# EAGLE board Faulty TL072 detector (EAGLE 7.6.0)
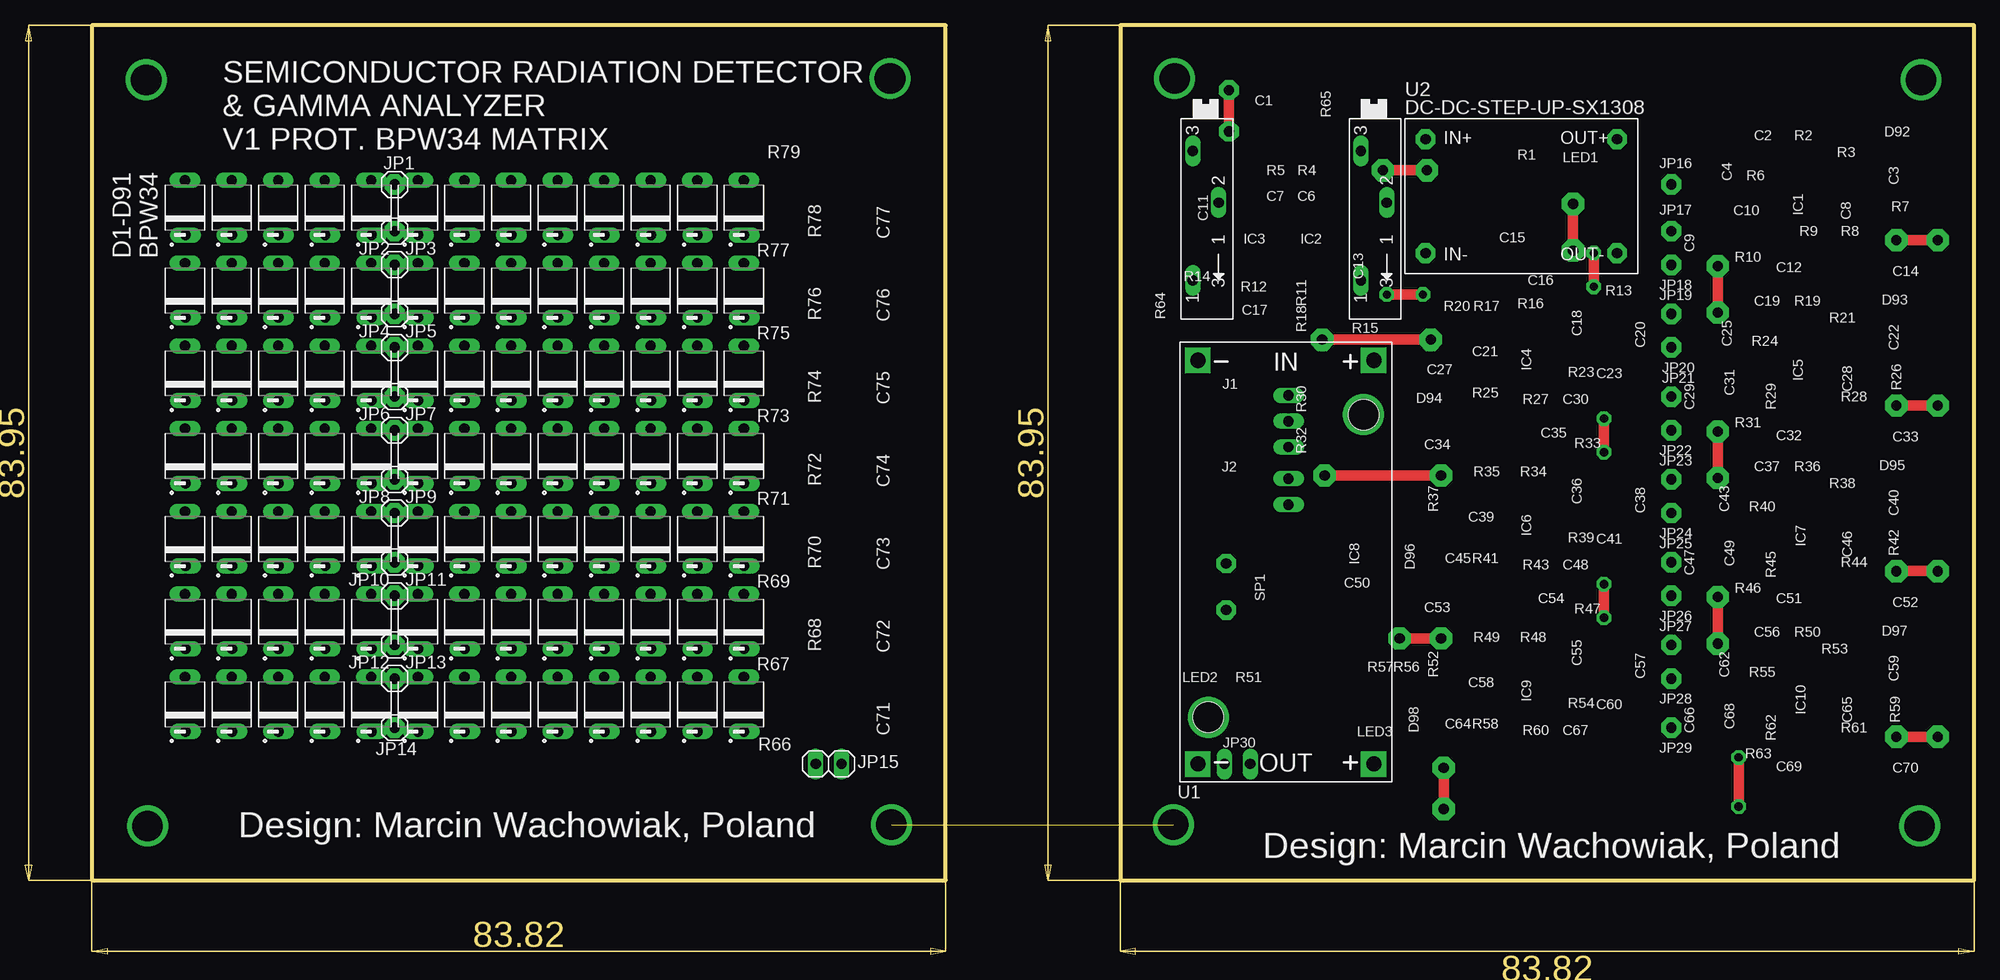
[diagram p0: board, top side]
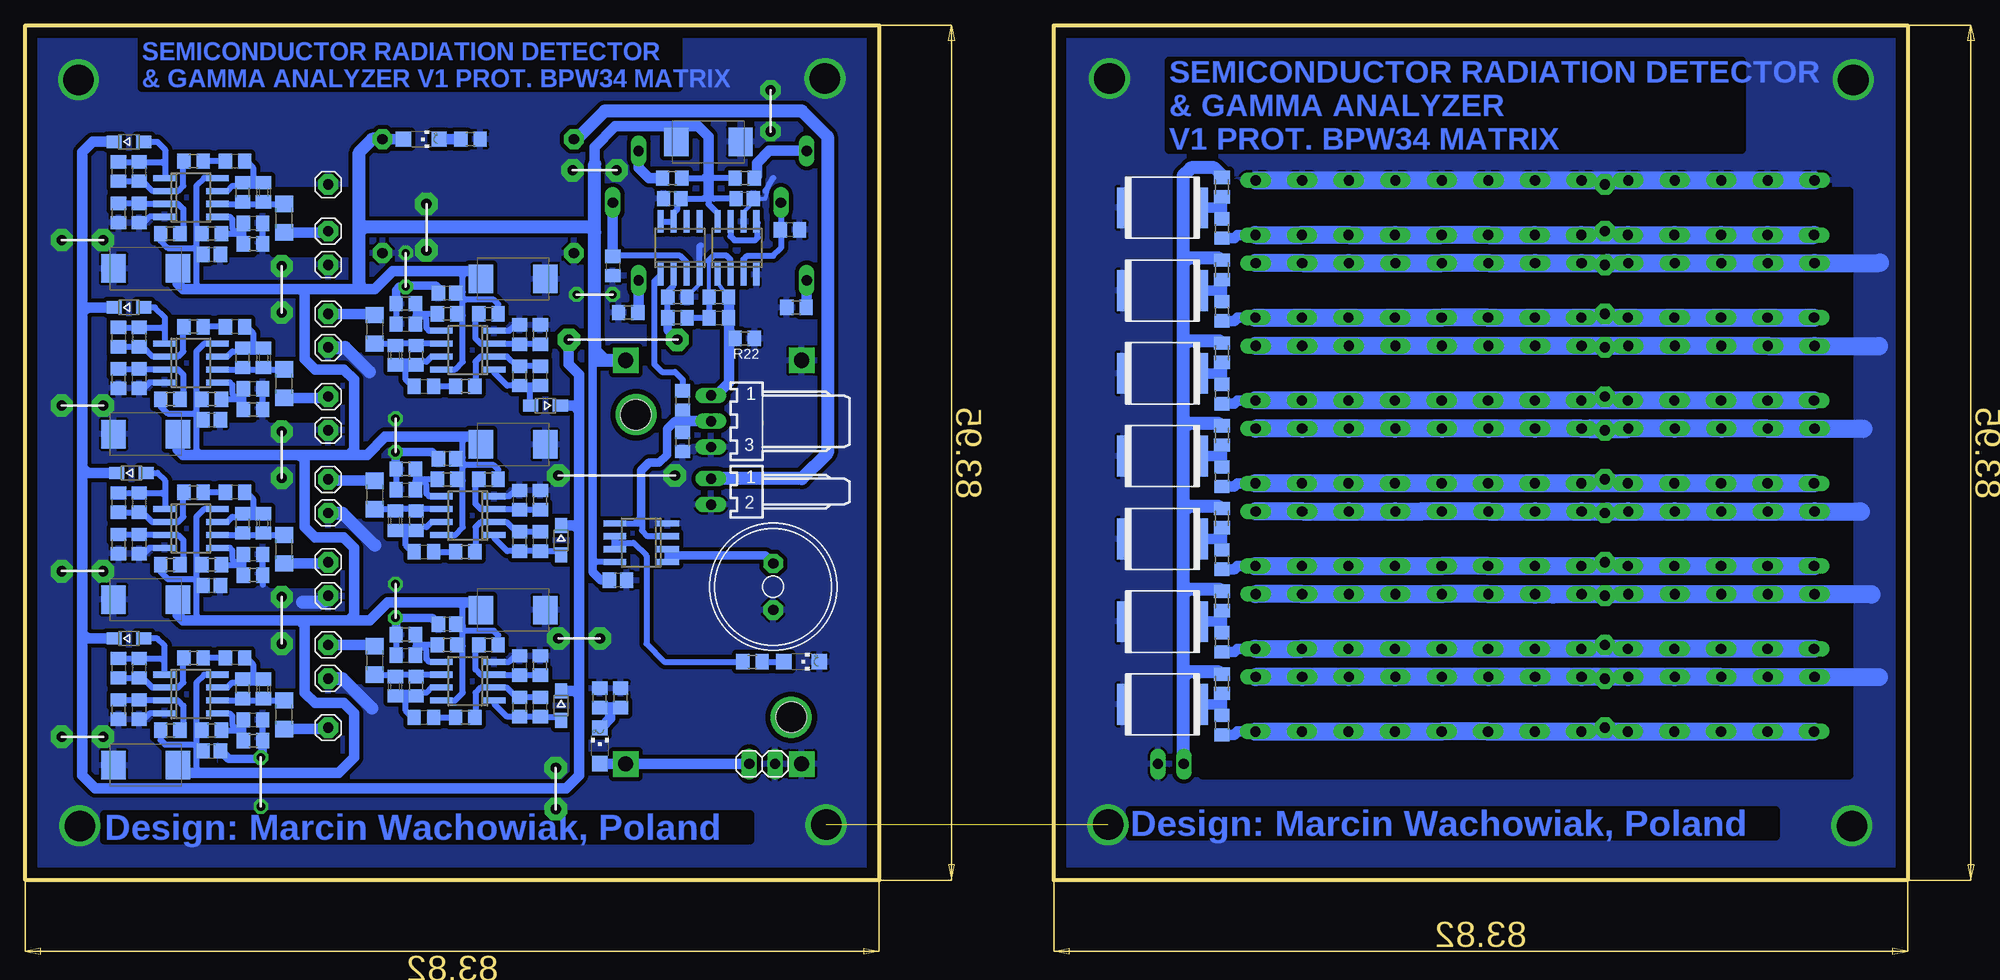
[diagram p1: board, bottom side, seen from below]

Size 184.78 x 83.95 mm. Coordinates in mm from the lower left corner, seen from the top.
Outline: 0,83.95 0,0 83.82,0 83.82,83.95 0,83.95
Outline: 184.78,83.95 100.97,83.95 100.97,0 184.78,0 184.78,83.95
Copper layers (1*16): Top 0.035mm / dielectric 1.5mm / Bottom 0.035mm
Design rules "default": minimum track width 10mil, minimum drill 24mil, track to track 8mil, track to pad 8mil, pad to pad 8mil, via to via 8mil, smd to smd 8mil, copper to edge 40mil, drill to drill 8mil, minimum pad ring 10mil, minimum via ring 8mil, stop-mask expansion 4mil, vias tented up to drill 0mil, thermal gap 10mil
bRestrict: area 153,61.6 to 160.4,67.7; area 154.3,29.1 to 160.7,32.9; area 154.3,13.3 to 160.7,17.1; area 154.3,12.1 to 160.7,13.3; area 154.3,45.3 to 160.7,49.4; area 148.5,52.2 to 156.3,57.3; area 148.5,35.9 to 156.3,41; area 148.5,19.7 to 156.3,24.8; area 5.7,10.3 to 65.9,67.7; area 65.9,15.4 to 69.2,68.5; area 65.9,10.3 to 69.2,15.4; area 160.7,11.4 to 165.5,13.3; area 162.4,29.1 to 165.7,29.6; area 162.4,45.3 to 165.7,45.8; area 162.4,61.6 to 165.7,62.1; area 143.9,57.3 to 148.5,58.5; area 143.9,41 to 148.5,42.3; area 143.9,24.8 to 148.5,26; area 148.5,24.8 to 149.6,26; area 119,59.3 to 119.1,59.7

## Footprints (pad centres in the part's own frame; a part is rotated, then mirrored left to right if it is on the bottom)
SMC_D = smd 2.4 x 2.8: + -3.15,0; - 3.15,0
C0805 = smd 1.3 x 1.5: 1 -0.95,0; 2 0.95,0
C0603 = smd 1.1 x 1: 1 -0.85,0; 2 0.85,0
C0805' = smd 1.3 x 1.5: 1 -0.85,0; 2 0.85,0
C1206 = smd 1.6 x 1.8: 1 -1.4,0; 2 1.4,0
2824 = smd 1.2 x 4: 1 -3.85,0; 2 3.85,0
PHODET_BPW34 = drill 1 long: A 2.699,0.001; C -2.667,-0.033
SOD323-W = smd 1.5 x 1.2: A 1.45,0; C -1.45,0
SO08 = smd 0.6 x 2.2: 1 -1.905,-2.6; 2 -0.635,-2.6; 3 0.635,-2.6; 4 1.905,-2.6; 5 1.905,2.6; 6 0.635,2.6; 7 -0.635,2.6; 8 -1.905,2.6
7395-03 = drill 1.016 long: 1 2.54,0; 2 0,0; 3 -2.54,0
7395-02 = drill 1.016 long: 1 1.27,0; 2 -1.27,0
1X01 = drill 1.016 pad 2 octagon: 1 0,0
1X02 = drill 1.016 long: 1 -1.27,0; 2 1.27,0
CHIPLED_1206 = smd 1.5 x 1.5: A 0,-1.75; C 0,1.75
R0805 = smd 1.3 x 1.5: 1 -0.95,0; 2 0.95,0
SP19L = drill 1.016 long: A 5.715,-1.27; E -6.985,-1.27; S -1.905,1.27
M0805 = smd 1.3 x 1.6: 1 -0.95,0; 2 0.95,0
AL11P = drill 1.016 pad 1.905 octagon: + 2.286,0; - -2.286,0
DC-DC-STEP-DOWN-LM2596 = drill 1.5 pad 2.5 square: IN+ -19.812,8.636; IN- -19.812,-8.636; OUT+ 19.812,8.636; OUT- 19.812,-8.636 | hole 3: -14.478,7.62; 15.24,-7.62
DC-DC-STEP-UP-SX1308 = drill 1 pad 1.93 octagon: IN+ -9.398,5.588; IN- -9.398,-5.588; OUT+ 9.398,5.588; OUT- 9.398,-5.588

## Placement (x,y rotation side)
C1  100u/25V  [SMC_D]  117.73,72.52 0 bottom
C2  22n  [C0805]  164.21,70.61 180 bottom
C3  10p  [C0805]  175.64,69.6 270 bottom
C4  0,5pF  [C0603]  161.42,67.56 270 bottom
C5  0,5/1p  [C0805]  161.42,67.56 270 bottom
C6  100n  [C0805']  121.28,66.93 180 bottom
C7  100n  [C0805']  114.17,66.93 0 bottom
C8  100n  [C0805]  173.61,65.53 90 bottom
C9  100n/100V  [C1206]  159.38,65.02 90 bottom
C10  100n  [C0805]  162.43,64.52 180 bottom
C11  100n  [C0805]  109.73,63.88 180 bottom
C12  100n  [C0805']  166.5,61.47 0 bottom
C13  100n  [C0805]  127.13,60.33 270 bottom
C14  100u/25V  [SMC_D]  172.97,60.07 180 bottom
C15  100u/25V  [SMC_D]  136.91,59.06 0 bottom
C16  100n  [C0805']  143.38,57.66 180 bottom
C17  10p  [C0805]  116.71,55.25 0 bottom
C18  100n  [C0805]  147.45,54.61 0 bottom
C19  22n  [C0805]  164.21,54.36 180 bottom
C20  100n/100V  [C1206]  150.5,54.1 270 bottom
C21  100n  [C0805]  136.27,53.59 270 bottom
C22  10p  [C0805]  175.64,53.34 270 bottom
C23  0,5pF  [C0603]  148.46,51.56 90 bottom
C24  0,5/1p  [C0805]  148.46,51.56 90 bottom
C25  0,5/1p  [C0603]  161.42,51.31 270 bottom
C26  0,5/1p  [C0805]  161.42,51.31 270 bottom
C27  10p  [C0805]  134.24,49.53 90 bottom
C28  100n  [C0805]  173.61,49.28 90 bottom
C29  100n/100V  [C1206]  159.38,48.77 90 bottom
C30  22n  [C0805]  145.67,48.51 0 bottom
C31  100n  [C0805]  162.43,48.26 180 bottom
C32  100n  [C0805']  166.5,45.21 0 bottom
C33  100u/25V  [SMC_D]  172.97,43.82 180 bottom
C34  100u/25V  [SMC_D]  136.91,42.8 0 bottom
C35  100n  [C0805']  143.38,41.4 180 bottom
C36  100n  [C0805]  147.45,38.35 0 bottom
C37  22n  [C0805]  164.21,38.1 180 bottom
C38  100n/100V  [C1206]  150.5,37.85 270 bottom
C39  100n  [C0805]  136.27,37.34 270 bottom
C40  10p  [C0805]  175.64,37.08 270 bottom
C41  0,5pF  [C0603]  148.46,35.31 90 bottom
C42  0,5/1p  [C0805]  148.46,35.31 90 bottom
C43  0,5pF  [C0603]  161.42,35.05 270 bottom
C44  0,5/1p  [C0805]  161.42,35.05 270 bottom
C45  10p  [C0805]  134.24,33.27 90 bottom
C46  100n  [C0805]  173.61,33.02 90 bottom
C47  100n/100V  [C1206]  159.38,32.51 90 bottom
C48  22n  [C0805]  145.67,32.26 0 bottom
C49  100n  [C0805]  162.43,32 180 bottom
C50  100n  [C0805']  126.62,29.46 180 bottom
C51  100n  [C0805']  166.5,28.96 0 bottom
C52  100u/25V  [SMC_D]  172.97,27.56 180 bottom
C53  100u/25V  [SMC_D]  136.91,26.54 0 bottom
C54  100n  [C0805']  143.38,25.15 180 bottom
C55  100n  [C0805]  147.45,22.1 0 bottom
C56  22n  [C0805]  164.21,21.84 180 bottom
C57  100n/100V  [C1206]  150.5,21.59 270 bottom
C58  100n  [C0805]  136.27,21.08 270 bottom
C59  10p  [C0805]  175.64,20.83 270 bottom
C60  0,5pF  [C0603]  148.46,19.05 90 bottom
C61  0,5/1p  [C0805]  148.46,19.05 90 bottom
C62  0,5pF  [C0603]  161.42,18.8 270 bottom
C63  0,5/1p  [C0805]  161.42,18.8 270 bottom
C64  10p  [C0805]  134.24,17.02 90 bottom
C65  100n  [C0805]  173.61,16.76 90 bottom
C66  100n/100V  [C1206]  159.38,16.26 90 bottom
C67  22n  [C0805]  145.67,16 0 bottom
C68  100n  [C0805]  162.43,15.75 180 bottom
C69  100n  [C0805']  166.5,12.7 0 bottom
C70  100u/25V  [SMC_D]  172.97,11.3 180 bottom
C71  2,2uF/100V  [2824]  73.15,17.27 180 bottom
C72  2,2uF/100V  [2824]  73.15,25.4 180 bottom
C73  2,2uF/100V  [2824]  73.15,33.53 180 bottom
C74  2,2uF/100V  [2824]  73.15,41.66 180 bottom
C75  2,2uF/100V  [2824]  73.15,49.78 180 bottom
C76  2,2uF/100V  [2824]  73.15,57.91 180 bottom
C77  2,2uF/100V  [2824]  73.15,66.04 180 bottom
D1  BPW34  [PHODET_BPW34]  9.14,66.04 90 top
D2  BPW34  [PHODET_BPW34]  13.72,66.04 90 top
D3  BPW34  [PHODET_BPW34]  18.29,66.04 90 top
D4  BPW34  [PHODET_BPW34]  22.86,66.04 90 top
D5  BPW34  [PHODET_BPW34]  27.43,66.04 90 top
D6  BPW34  [PHODET_BPW34]  32,66.04 90 top
D7  BPW34  [PHODET_BPW34]  36.58,66.04 90 top
D8  BPW34  [PHODET_BPW34]  41.15,66.04 90 top
D9  BPW34  [PHODET_BPW34]  45.72,66.04 90 top
D10  BPW34  [PHODET_BPW34]  50.29,66.04 90 top
D11  BPW34  [PHODET_BPW34]  54.86,66.04 90 top
D12  BPW34  [PHODET_BPW34]  59.44,66.04 90 top
D13  BPW34  [PHODET_BPW34]  64.01,66.04 90 top
D14  BPW34  [PHODET_BPW34]  9.14,57.91 90 top
D15  BPW34  [PHODET_BPW34]  13.72,57.91 90 top
D16  BPW34  [PHODET_BPW34]  18.29,57.91 90 top
D17  BPW34  [PHODET_BPW34]  22.86,57.91 90 top
D18  BPW34  [PHODET_BPW34]  27.43,57.91 90 top
D19  BPW34  [PHODET_BPW34]  32,57.91 90 top
D20  BPW34  [PHODET_BPW34]  36.58,57.91 90 top
D21  BPW34  [PHODET_BPW34]  41.15,57.91 90 top
D22  BPW34  [PHODET_BPW34]  45.72,57.91 90 top
D23  BPW34  [PHODET_BPW34]  50.29,57.91 90 top
D24  BPW34  [PHODET_BPW34]  54.86,57.91 90 top
D25  BPW34  [PHODET_BPW34]  59.44,57.91 90 top
D26  BPW34  [PHODET_BPW34]  64.01,57.91 90 top
D27  BPW34  [PHODET_BPW34]  9.14,49.78 90 top
D28  BPW34  [PHODET_BPW34]  13.72,49.78 90 top
D29  BPW34  [PHODET_BPW34]  18.29,49.78 90 top
D30  BPW34  [PHODET_BPW34]  22.86,49.78 90 top
D31  BPW34  [PHODET_BPW34]  27.43,49.78 90 top
D32  BPW34  [PHODET_BPW34]  32,49.78 90 top
D33  BPW34  [PHODET_BPW34]  36.58,49.78 90 top
D34  BPW34  [PHODET_BPW34]  41.15,49.78 90 top
D35  BPW34  [PHODET_BPW34]  45.72,49.78 90 top
D36  BPW34  [PHODET_BPW34]  50.29,49.78 90 top
D37  BPW34  [PHODET_BPW34]  54.86,49.78 90 top
D38  BPW34  [PHODET_BPW34]  59.44,49.78 90 top
D39  BPW34  [PHODET_BPW34]  64.01,49.78 90 top
D40  BPW34  [PHODET_BPW34]  9.14,41.66 90 top
D41  BPW34  [PHODET_BPW34]  13.72,41.66 90 top
D42  BPW34  [PHODET_BPW34]  18.29,41.66 90 top
D43  BPW34  [PHODET_BPW34]  22.86,41.66 90 top
D44  BPW34  [PHODET_BPW34]  27.43,41.66 90 top
D45  BPW34  [PHODET_BPW34]  32,41.66 90 top
D46  BPW34  [PHODET_BPW34]  36.58,41.66 90 top
D47  BPW34  [PHODET_BPW34]  41.15,41.66 90 top
D48  BPW34  [PHODET_BPW34]  45.72,41.66 90 top
D49  BPW34  [PHODET_BPW34]  50.29,41.66 90 top
D50  BPW34  [PHODET_BPW34]  54.86,41.66 90 top
D51  BPW34  [PHODET_BPW34]  59.44,41.66 90 top
D52  BPW34  [PHODET_BPW34]  64.01,41.66 90 top
D53  BPW34  [PHODET_BPW34]  9.14,33.53 90 top
D54  BPW34  [PHODET_BPW34]  13.72,33.53 90 top
D55  BPW34  [PHODET_BPW34]  18.29,33.53 90 top
D56  BPW34  [PHODET_BPW34]  22.86,33.53 90 top
D57  BPW34  [PHODET_BPW34]  27.43,33.53 90 top
D58  BPW34  [PHODET_BPW34]  32,33.53 90 top
D59  BPW34  [PHODET_BPW34]  36.58,33.53 90 top
D60  BPW34  [PHODET_BPW34]  41.15,33.53 90 top
D61  BPW34  [PHODET_BPW34]  45.72,33.53 90 top
D62  BPW34  [PHODET_BPW34]  50.29,33.53 90 top
D63  BPW34  [PHODET_BPW34]  54.86,33.53 90 top
D64  BPW34  [PHODET_BPW34]  59.44,33.53 90 top
D65  BPW34  [PHODET_BPW34]  64.01,33.53 90 top
D66  BPW34  [PHODET_BPW34]  9.14,25.4 90 top
D67  BPW34  [PHODET_BPW34]  13.72,25.4 90 top
D68  BPW34  [PHODET_BPW34]  18.29,25.4 90 top
D69  BPW34  [PHODET_BPW34]  22.86,25.4 90 top
D70  BPW34  [PHODET_BPW34]  27.43,25.4 90 top
D71  BPW34  [PHODET_BPW34]  32,25.4 90 top
D72  BPW34  [PHODET_BPW34]  36.58,25.4 90 top
D73  BPW34  [PHODET_BPW34]  41.15,25.4 90 top
D74  BPW34  [PHODET_BPW34]  45.72,25.4 90 top
D75  BPW34  [PHODET_BPW34]  50.29,25.4 90 top
D76  BPW34  [PHODET_BPW34]  54.86,25.4 90 top
D77  BPW34  [PHODET_BPW34]  59.44,25.4 90 top
D78  BPW34  [PHODET_BPW34]  64.01,25.4 90 top
D79  BPW34  [PHODET_BPW34]  9.14,17.27 90 top
D80  BPW34  [PHODET_BPW34]  13.72,17.27 90 top
D81  BPW34  [PHODET_BPW34]  18.29,17.27 90 top
D82  BPW34  [PHODET_BPW34]  22.86,17.27 90 top
D83  BPW34  [PHODET_BPW34]  27.43,17.27 90 top
D84  BPW34  [PHODET_BPW34]  32,17.27 90 top
D85  BPW34  [PHODET_BPW34]  36.58,17.27 90 top
D86  BPW34  [PHODET_BPW34]  41.15,17.27 90 top
D87  BPW34  [PHODET_BPW34]  45.72,17.27 90 top
D88  BPW34  [PHODET_BPW34]  50.29,17.27 90 top
D89  BPW34  [PHODET_BPW34]  54.86,17.27 90 top
D90  BPW34  [PHODET_BPW34]  59.44,17.27 90 top
D91  BPW34  [PHODET_BPW34]  64.01,17.27 90 top
D92  1N4448  [SOD323-W]  174.62,72.52 0 bottom
D93  1N4448  [SOD323-W]  174.62,56.26 0 bottom
D94  1N4448  [SOD323-W]  133.73,46.61 180 bottom
D95  1N4448  [SOD323-W]  174.37,40.01 0 bottom
D96  1N4448  [SOD323-W]  132.21,33.4 270 bottom
D97  1N4448  [SOD323-W]  174.62,23.75 0 bottom
D98  1N4448  [SOD323-W]  132.21,17.14 270 bottom
IC1  TL072  [SO08]  168.53,67.06 270 bottom
IC2  LM311  [SO08]  120.52,62.1 0 bottom
IC3  LM358  [SO08]  114.94,62.1 0 bottom
IC4  TL072  [SO08]  141.35,52.07 90 bottom
IC5  TL072  [SO08]  168.53,50.8 270 bottom
IC6  TL072  [SO08]  141.35,35.81 90 bottom
IC7  TL072  [SO08]  168.53,34.54 270 bottom
IC8  LM358  [SO08]  124.33,33.15 90 bottom
IC9  TL072  [SO08]  141.35,19.56 90 bottom
IC10  TL072  [SO08]  168.53,18.29 270 bottom
J1  3pin  [7395-03]  117.47,45.09 90 bottom
J2  2pin  [7395-02]  117.47,38.16 90 bottom
JP1  [1X01]  29.72,68.33 0 top
JP2  [1X01]  29.72,63.75 0 top
JP3  [1X01]  29.72,60.45 0 top
JP4  [1X01]  29.72,55.63 0 top
JP5  [1X01]  29.72,52.32 0 top
JP6  [1X01]  29.72,47.5 0 top
JP7  [1X01]  29.72,44.2 0 top
JP8  [1X01]  29.72,39.37 0 top
JP9  [1X01]  29.72,36.07 0 top
JP10  [1X01]  29.72,31.24 0 top
JP11  [1X01]  29.72,27.94 0 top
JP12  [1X01]  29.72,23.11 0 top
JP13  [1X01]  29.72,19.81 0 top
JP14  [1X01]  29.72,14.99 0 top
JP15  GP  [1X02]  72.33,11.43 180 top
JP16  [1X01]  155.07,68.33 0 bottom
JP17  [1X01]  155.07,63.75 0 bottom
JP18  [1X01]  155.07,60.45 0 bottom
JP19  [1X01]  155.07,55.63 0 bottom
JP20  [1X01]  155.07,52.32 0 bottom
JP21  [1X01]  155.07,47.5 0 bottom
JP22  [1X01]  155.07,44.2 0 bottom
JP23  [1X01]  155.07,39.37 0 bottom
JP24  [1X01]  155.07,36.07 0 bottom
JP25  [1X01]  155.07,31.24 0 bottom
JP26  [1X01]  155.07,27.94 0 bottom
JP27  [1X01]  155.07,23.11 0 bottom
JP28  [1X01]  155.07,19.81 0 bottom
JP29  [1X01]  155.07,14.99 0 bottom
JP30  [1X02]  112.46,11.43 0 bottom
LED1  GREEN  [CHIPLED_1206]  145.92,72.77 270 bottom
LED2  RED  [CHIPLED_1206]  108.59,21.46 270 bottom
LED3  GREEN  [CHIPLED_1206]  128.4,13.21 0 bottom
R1  3k  [R0805]  141.1,72.77 0 bottom
R2  1k  [R0805]  168.28,70.61 0 bottom
R3  100k  [R0805]  173.61,69.6 270 bottom
R4  1k  [R0805]  121.28,68.96 180 bottom
R5  1k  [R0805]  114.17,68.96 180 bottom
R6  10M  [R0805]  163.45,67.56 270 bottom
R7  10k  [R0805]  175.64,65.53 270 bottom
R8  10k  [R0805]  170.56,63.5 0 bottom
R9  10k  [R0805]  166.5,63.5 0 bottom
R10  10k  [R0805]  162.43,62.48 0 bottom
R11  10k  [R0805]  120.78,57.28 0 bottom
R12  ***  [R0805]  116.71,57.28 0 bottom
R13  10k  [R0805]  147.45,56.64 180 bottom
R14  1k  [R0805]  109.09,56.26 0 bottom
R15  1k  [R0805]  125.6,55.75 180 bottom
R16  10k  [R0805]  143.38,55.63 180 bottom
R17  10k  [R0805]  139.32,55.63 180 bottom
R18  10k  [R0805]  120.78,55.25 0 bottom
R19  1k  [R0805]  168.28,54.36 0 bottom
R20  10k  [R0805]  134.24,53.59 90 bottom
R21  100k  [R0805]  173.61,53.34 270 bottom
R22  10k  [R0805]  114.17,53.21 180 bottom
R23  10M  [R0805]  146.43,51.56 90 bottom
R24  10M  [R0805]  163.45,51.31 270 bottom
R25  100k  [R0805]  136.27,49.53 90 bottom
R26  10k  [R0805]  175.64,49.28 270 bottom
R27  1k  [R0805]  141.61,48.51 180 bottom
R28  10k  [R0805]  170.56,47.24 0 bottom
R29  10k  [R0805]  166.5,47.24 0 bottom
R30  1200  [R0805]  120.27,47.12 270 bottom
R31  10k  [R0805]  162.43,46.23 0 bottom
R32  560  [R0805]  120.27,43.05 270 bottom
R33  10k  [R0805]  147.45,40.39 180 bottom
R34  10k  [R0805]  143.38,39.37 180 bottom
R35  10k  [R0805]  139.32,39.37 180 bottom
R36  1k  [R0805]  168.28,38.1 0 bottom
R37  10k  [R0805]  134.24,37.34 90 bottom
R38  100k  [R0805]  173.61,37.08 270 bottom
R39  10M  [R0805]  146.43,35.31 90 bottom
R40  10M  [R0805]  163.45,35.05 270 bottom
R41  100k  [R0805]  136.27,33.27 90 bottom
R42  10k  [R0805]  175.64,33.02 270 bottom
R43  1k  [R0805]  141.61,32.26 180 bottom
R44  10k  [R0805]  170.56,30.99 0 bottom
R45  10k  [R0805]  166.5,30.99 0 bottom
R46  10k  [R0805]  162.43,29.97 0 bottom
R47  10k  [R0805]  147.45,24.13 180 bottom
R48  10k  [R0805]  143.38,23.11 180 bottom
R49  10k  [R0805]  139.32,23.11 180 bottom
R50  1k  [R0805]  168.28,21.84 0 bottom
R51  470  [R0805]  113.41,21.46 180 bottom
R52  10k  [R0805]  134.24,21.08 90 bottom
R53  100k  [R0805]  173.61,20.83 270 bottom
R54  10M  [R0805]  146.43,19.05 90 bottom
R55  10M  [R0805]  163.45,18.8 270 bottom
R56  20k  [R0805]  128.4,17.91 90 bottom
R57  20k  [R0805]  126.36,17.91 90 bottom
R58  100k  [R0805]  136.27,17.02 90 bottom
R59  10k  [R0805]  175.64,16.76 270 bottom
R60  1k  [R0805]  141.61,16 180 bottom
R61  10k  [R0805]  170.56,14.73 0 bottom
R62  10k  [R0805]  166.5,14.73 0 bottom
R63  10k  [R0805]  162.43,13.72 0 bottom
R64  100-330 prec  [SP19L]  109.35,64.64 270 top
R65  100-330 prec  [SP19L]  125.86,64.64 270 top
R66  100M  [R0805]  67.31,15.24 270 bottom
R67  1M  [M0805]  67.31,19.3 270 bottom
R68  100M  [R0805]  67.31,23.37 270 bottom
R69  1M  [M0805]  67.31,27.43 270 bottom
R70  100M  [R0805]  67.31,31.5 270 bottom
R71  1M  [M0805]  67.31,35.56 270 bottom
R72  100M  [R0805]  67.31,39.62 270 bottom
R73  1M  [M0805]  67.31,43.69 270 bottom
R74  100M  [R0805]  67.31,47.75 270 bottom
R75  1M  [M0805]  67.31,51.82 270 bottom
R76  100M  [R0805]  67.31,55.88 270 bottom
R77  1M  [M0805]  67.31,59.94 270 bottom
R78  100M  [R0805]  67.31,64.01 270 bottom
R79  1M  [M0805]  67.31,68.07 270 bottom
SP1  BUZ  [AL11P]  111.38,28.83 90 bottom
U1  DC-DC-STEP-UP-LM2596  [DC-DC-STEP-DOWN-LM2596]  117.22,31.24 270 top
U2  DC-DC-STEP-UP-SX1308  [DC-DC-STEP-UP-SX1308]  140.34,67.18 0 top

## Library data of the parts
C1-C5 C8-C11 C13-C15 C17-C31 C33 C34 C36-C49 C52 C53 C55-C68 C70 R1-R63 R66-R79 = rcl
C6 C7 C12 C16 C32 C35 C50 C51 C54 C69 = resistor
C71-C77 = capacitor-wima
D1-D91 = BPW34; AVAILABILITY: Good; DESCRIPTION: 950 nm 100 ns %C2%B1 65%C2%B0 Wide Angle Half Sensitivity TO-5 Silicon PIN Photodiode; MF: Vishay; MP: BPW34; PACKAGE: SMD-2 Vishay; PRICE: 0.62 USD
D92-D98 = diode
IC1-IC10 = linear
J1 = con-molex; OC_FARNELL: unknown; OC_NEWARK: unknown
J2 = con-molex; OC_FARNELL: 9731601; OC_NEWARK: unknown
JP1-JP30 = pinhead
LED1-LED3 = led
R64 R65 = pot
SP1 = buzzer; OC_FARNELL: unknown; OC_NEWARK: unknown
U1 U2 = diy-modules

## Nets
+18V: C1.+ C6.1 C7.1 C12.1 C14.+ C15.+ C16.1 C32.1 C33.+ C34.+ C35.1 C50.2 C51.1 C52.+ C53.+ C54.1 C69.1 C70.+ IC1.8 IC2.7 IC2.8 IC3.8 IC4.8 IC5.8 IC6.8 IC7.8 IC8.8 IC9.8 IC10.8 LED1.A R4.1 R5.2 R8.1 R9.1 R16.1 R17.1 R28.1 R29.1 R34.1 R35.1 R44.1 R45.1 R48.1 R49.1 R61.1 R62.1 U1.IN+ U2.OUT+
+24V: JP30.1 LED3.A U1.OUT+
+60: JP15.2 R67.1 R69.1 R71.1 R73.1 R75.1 R77.1 R79.1
A-OUT: C17.2 IC3.1 J1.1 R12.2 R22.2
D-OUT+5V: IC8.3 IC8.5 J1.2 R30.2 R32.1
GND: C1.- C6.2 C7.2 C8.1 C10.1 C11.1 C12.2 C13.2 C14.- C15.- C16.2 C18.1 C21.1 C28.1 C31.1 C32.2 C33.- C34.- C35.2 C36.1 C39.1 C46.1 C49.1 C50.1 C51.2 C52.- C53.- C54.2 C55.1 C58.1 C65.1 C68.1 C69.2 C70.- C71.2 C72.2 C73.2 C74.2 C75.2 C76.2 C77.2 D1.A D2.A D3.A D4.A D5.A D6.A D7.A D8.A D9.A D10.A D11.A D12.A D13.A D14.A D15.A D16.A D17.A D18.A D19.A D20.A D21.A D22.A D23.A D24.A D25.A D26.A D27.A D28.A D29.A D30.A D31.A D32.A D33.A D34.A D35.A D36.A D37.A D38.A D39.A D40.A D41.A D42.A D43.A D44.A D45.A D46.A D47.A D48.A D49.A D50.A D51.A D52.A D53.A D54.A D55.A D56.A D57.A D58.A D59.A D60.A D61.A D62.A D63.A D64.A D65.A D66.A D67.A D68.A D69.A D70.A D71.A D72.A D73.A D74.A D75.A D76.A D77.A D78.A D79.A D80.A D81.A D82.A D83.A D84.A D85.A D86.A D87.A D88.A D89.A D90.A D91.A IC1.4 IC2.4 IC3.4 IC3.6 IC4.4 IC5.4 IC6.4 IC7.4 IC8.4 IC9.4 IC10.4 J1.3 J2.2 JP1.1 JP3.1 JP5.1 JP7.1 JP9.1 JP11.1 JP13.1 JP15.1 JP16.1 JP18.1 JP20.1 JP22.1 JP24.1 JP26.1 JP28.1 JP30.2 LED2.C R1.2 R7.2 R10.2 R11.2 R13.2 R14.1 R15.2 R20.2 R22.1 R26.2 R31.2 R32.2 R33.2 R37.2 R42.2 R46.2 R47.2 R52.2 R56.2 R57.2 R59.2 R63.2 SP1.- U1.IN- U1.OUT- U2.IN- U2.OUT-
N$1: C10.2 IC1.5 R9.2 R10.1
N$3: C2.1 C4.1 C5.1 IC1.7 R6.1
N$4: J2.1 U2.IN+
N$5: C77.1 R78.1 R79.2
N$6: C8.2 IC1.3 R7.1 R8.2
N$7: C2.2 R2.2
N$8: C4.2 C5.2 C9.2 IC1.6 R6.2
N$9: C3.2 IC1.2 R2.1 R3.2
N$10: C3.1 D92.A IC1.1 R3.1
N$12: D92.C D93.C D94.C D95.C D96.C D97.C D98.C IC2.2 R11.1 R18.1
N$13: C76.1 R76.1 R77.2
N$14: C75.1 R74.1 R75.2
N$15: C74.1 R72.1 R73.2
N$16: C73.1 R70.1 R71.2
N$17: C72.1 R68.1 R69.2
N$18: C71.1 R66.1 R67.2
N$23: IC2.1 R30.1
N$24: C17.1 IC3.2 R12.1 R18.2
N$25: C13.1 IC2.3 R65.S
N$26: R4.2 R65.E
N$27: R15.1 R65.A
N$28: C25.2 C26.2 C29.2 IC5.6 R24.2
N$29: R5.1 R64.E
N$30: R14.2 R64.A
N$31: C11.2 IC3.3 R64.S
N$32: LED1.C R1.1
N$33: C31.2 IC5.5 R29.2 R31.1
N$34: LED3.C R56.1 R57.1
N$35: C19.1 C25.1 C26.1 IC5.7 R24.1
N$36: C19.2 R19.2
N$37: C22.2 IC5.2 R19.1 R21.2
N$38: C22.1 D93.A IC5.1 R21.1
N$39: C28.2 IC5.3 R26.1 R28.2
N$40: C38.2 C41.2 C42.2 IC6.6 R39.2
N$41: C36.2 IC6.5 R33.1 R34.2
N$42: C43.2 C44.2 C47.2 IC7.6 R40.2
N$43: C49.2 IC7.5 R45.2 R46.1
N$44: C37.1 C43.1 C44.1 IC7.7 R40.1
N$45: C37.2 R36.2
N$46: C40.2 IC7.2 R36.1 R38.2
N$47: C40.1 D95.A IC7.1 R38.1
N$48: C46.2 IC7.3 R42.1 R44.2
N$49: C41.1 C42.1 C48.1 IC6.7 R39.1
N$50: C48.2 R43.2
N$51: C62.2 C63.2 C66.2 IC10.6 R55.2
N$52: C68.2 IC10.5 R62.2 R63.1
N$53: C56.1 C62.1 C63.1 IC10.7 R55.1
N$54: C56.2 R50.2
N$55: C59.2 IC10.2 R50.1 R53.2
N$56: C59.1 D97.A IC10.1 R53.1
N$57: C65.2 IC10.3 R59.1 R61.2
N$58: C45.2 IC6.2 R41.2 R43.1
N$59: C45.1 D96.A IC6.1 R41.1
N$60: C20.2 C23.2 C24.2 IC4.6 R23.2
N$61: C18.2 IC4.5 R13.1 R16.2
N$62: C23.1 C24.1 C30.1 IC4.7 R23.1
N$63: C30.2 R27.2
N$64: C27.2 IC4.2 R25.2 R27.1
N$65: C27.1 D94.A IC4.1 R25.1
N$66: C21.2 IC4.3 R17.2 R20.1
N$67: C39.2 IC6.3 R35.2 R37.1
N$69: C57.2 C60.2 C61.2 IC9.6 R54.2
N$70: C55.2 IC9.5 R47.1 R48.2
N$71: C60.1 C61.1 C67.1 IC9.7 R54.1
N$72: C67.2 R60.2
N$73: C64.2 IC9.2 R58.2 R60.1
N$74: C64.1 D98.A IC9.1 R58.1
N$75: C58.2 IC9.3 R49.2 R52.1
N$78: IC8.1 IC8.2 SP1.+
N$79: IC8.6 IC8.7 R51.2
OUT1: D27.C D28.C D29.C D30.C D31.C D32.C D33.C D34.C D35.C D36.C D37.C D38.C D39.C JP6.1 R74.2
OUT3: D79.C D80.C D81.C D82.C D83.C D84.C D85.C D86.C D87.C D88.C D89.C D90.C D91.C JP14.1 R66.2
OUT4: D1.C D2.C D3.C D4.C D5.C D6.C D7.C D8.C D9.C D10.C D11.C D12.C D13.C JP2.1 R78.2
OUT5: D14.C D15.C D16.C D17.C D18.C D19.C D20.C D21.C D22.C D23.C D24.C D25.C D26.C JP4.1 R76.2
OUT9: D40.C D41.C D42.C D43.C D44.C D45.C D46.C D47.C D48.C D49.C D50.C D51.C D52.C JP8.1 R72.2
OUT10: C9.1 JP17.1
OUT12: C20.1 JP19.1
OUT13: C66.1 JP29.1
OUT14: C29.1 JP21.1
OUT15: C38.1 JP23.1
OUT16: C47.1 JP25.1
OUT17: C57.1 JP27.1
OUT21: D53.C D54.C D55.C D56.C D57.C D58.C D59.C D60.C D61.C D62.C D63.C D64.C D65.C JP10.1 R70.2
OUT22: D66.C D67.C D68.C D69.C D70.C D71.C D72.C D73.C D74.C D75.C D76.C D77.C D78.C JP12.1 R68.2
S$1: IC3.5 IC3.7
S$2: LED2.A R51.1

## Tracks (layer width: path | path; a pad name or v marks a point on that pad's centre or on a via)
+18V
  Bottom 0.61: IC4.8 142.62,50.17 141.86,50.93 141.86,55.5 | R16.1 141.99,55.63 141.86,55.5 | IC10.8 167.26,20.19 168.02,19.43 168.02,14.86 | C69.1 167.47,12.57 168.02,12.57 | R62.1 167.89,14.73 168.02,14.86 | IC7.8 167.26,36.45 168.02,35.69 168.02,31.11 | R45.1 167.89,30.99 168.02,31.11 | IC5.8 167.26,52.7 168.02,51.94 168.02,47.37 | C32.1 167.47,45.09 167.77,45.09 168.02,45.34 | R29.1 167.89,47.24 168.02,47.37 | IC1.8 167.26,68.96 168.02,68.2 168.02,63.63 | 167.47,61.34 C12.1 167.73,61.85 168.02,61.85 | R9.1 167.89,63.5 168.02,63.63 | 120.34,67.28 C6.1 | 120.34,71.72 C1.+ | IC6.8 142.62,33.91 141.86,34.67 141.86,39.24 | 141.86,39.24 141.86,40.77 | R34.1 141.99,39.37 141.86,39.24 | IC9.8 142.62,17.65 141.86,18.42 141.86,22.99 | 141.86,22.99 141.86,24.51 | R48.1 141.99,23.11 141.86,22.99 | 141.86,55.5 141.86,57.02 | 141.86,57.02 141.86,57.28 | 141.86,57.28 141.86,57.79 | C16.1 141.99,57.66 141.86,57.79 | 168.02,63.63 168.02,61.85 | 168.02,61.85 168.02,58.55 | 168.02,58.55 168.02,58.04 | R8.1 171.51,62.8 170.81,62.1 168.28,62.1 168.02,61.85 | R17.1 138.37,56.58 138.81,57.02 141.61,57.02 | 141.61,57.02 141.86,57.02 | 141.61,57.02 141.86,57.28 | 141.86,40.77 141.86,41.02 | 141.86,41.02 141.86,41.53 | 141.86,41.53 141.86,43.05 142.37,43.56 | 168.02,47.37 168.02,45.59 | 168.02,45.59 168.02,45.34 | 168.02,45.34 168.02,42.29 | R28.1 171.51,46.54 170.81,45.85 168.28,45.85 168.02,45.59 | R35.1 138.37,40.33 138.81,40.77 141.61,40.77 | 141.61,40.77 141.86,40.77 | 141.61,40.77 141.86,41.02 | C35.1 141.99,41.4 141.86,41.53 | 141.86,24.51 141.86,24.77 | 168.02,31.11 168.02,29.34 | 168.02,29.34 168.02,29.08 | 168.02,29.08 168.02,26.04 | 168.02,26.04 168.02,25.53
  Bottom 0.61: R44.1 171.51,30.29 170.81,29.59 168.28,29.59 168.02,29.34 | R49.1 138.37,24.07 138.81,24.51 141.61,24.51 | 141.61,24.51 141.86,24.51 | 141.61,24.51 141.86,24.77 | C51.1 167.89,28.96 168.02,29.08 | 141.86,24.77 141.86,25.02 | C54.1 141.99,25.15 141.86,25.02 | 141.86,25.02 141.86,26.8 142.37,27.31 | 168.02,26.04 167.77,25.78 167.77,25.53 | 168.02,41.78 168.02,42.29 | 168.02,42.29 167.26,41.78 | 168.02,58.55 167.51,58.04 | 141.86,57.79 141.86,59.31 142.37,59.82 | 168.02,14.86 168.02,13.08 | 168.02,13.08 168.02,12.57 | 168.02,12.57 168.02,11.05 167.51,10.54 | 170.56,10.79 170.33,10.79 C70.+ | R61.1 171.51,13.78 171.07,13.34 168.28,13.34 168.02,13.08 | IC2.8 IC2.7 121.16,65.53 120.78,65.91 120.78,66.59 C6.1 | R5.2 117.22,68.96 117.73,69.47 118.24,68.96 R4.1 | C6.1 118.24,66.93 | 118.24,66.93 117.98,67.18 | IC3.8 116.84,65.53 117.73,66.42 117.73,67.18 | 117.98,66.93 117.98,67.18 | 117.98,67.18 117.73,67.44 117.22,66.93 | C7.1 118.24,66.93 | 129.1,52.58 128.91,52.96 | IC8.8 128.71,31.24 129.1,31.62
  Bottom 0.813: 149.99,73.03 U2.OUT+ | 129.1,52.58 129.1,31.62 129.1,30.29 128.27,29.46 C50.2
  Bottom 1.016: C14.+ 169.82,58.57 169.29,58.04 168.02,58.04 167.51,58.04 157.86,58.04 | C33.+ 169.82,42.32 169.29,41.78 168.02,41.78 167.26,41.78 157.1,41.78 | C52.+ 169.82,26.06 169.29,25.53 168.02,25.53 167.77,25.53 157.86,25.53 | 157.86,25.53 153.03,25.53 | 153.03,25.53 152.78,25.53 | 153.03,41.78 152.53,42.29 152.53,49.15 153.54,50.17 156.34,50.17 157.35,51.18 157.35,57.79 157.86,58.04 | 152.91,25.65 152.53,26.04 152.53,32.64 153.54,33.66 156.34,33.66 157.35,34.67 157.35,41.28 157.48,41.4 | 152.91,25.65 153.03,25.53 | 157.48,41.4 157.86,41.78 | 153.03,41.78 157.1,41.78 | 157.1,41.78 157.48,41.4 | 152.78,25.53 152.91,25.65 | 169.57,11.05 C70.+ | 157.86,25.53 157.35,25.02 157.35,18.42 156.34,17.4 153.54,17.4 152.53,16.38 152.53,12.07 154.05,10.54 167.51,10.54 169.55,10.54 | 157.86,58.04 152.53,58.04 | 152.53,58.04 152.02,58.04 | 152.02,58.04 150.5,58.04 148.72,59.82 142.37,59.82 140.82,59.82 C15.+ | C1.+ 120.52,72.87 120.52,73.79 120.78,74.04 | 152.02,59.06 152.02,58.55 | 152.02,58.55 152.02,58.04 | 152.02,58.55 152.53,58.04 | LED1.A U2.OUT+ | 117.73,67.18 117.73,67.44 117.73,69.47 117.73,73.03 118.75,74.04 120.78,74.04 | 152.78,25.53 151,25.53 149.22,27.31 142.37,27.31 140.82,27.31 C53.+ | 153.03,41.78 151.26,41.78 149.48,43.56 142.37,43.56 140.82,43.56 C34.+ | 120.78,74.04 126.87,74.04 128.91,72.01 128.91,69.85
  Bottom 1.27: U2.OUT+ 150.75,72.77 152.02,71.5 152.02,63.63 | 152.02,58.55 152.02,63.63 | U1.IN+ 127.89,51.05 | 127.89,51.05 128.52,51.05 | 128.91,63.63 128.91,52.96 128.91,52.07 127.89,51.05 | 152.02,63.63 151.51,64.14 129.41,64.14 128.91,63.63 | 169.57,11.05 169.57,10.57 169.55,10.54 | 128.91,63.63 128.91,69.85 128.91,70.36
+24V
  Bottom 1.016: 128.24,11.43 LED3.A 128.37,11.43 U1.OUT+ JP30.1
+60
  Bottom 1.016: R69.1 67.31,28.47
  Bottom 1.27: R79.1 67.31,69.11 arc-45 67.38,69.29 68.07,69.98 70.25,69.98 arc-45 70.43,69.9 71.12,69.22 71.12,60.58 | 71.12,60.58 71.12,52.45 | 71.12,52.45 71.12,44.32 | 71.12,44.32 71.12,36.2 | 71.12,36.2 71.12,28.07 | 71.12,28.07 71.12,19.94 | 71.12,19.94 71.12,11.43 JP15.2 | R67.1 arc45 67.41,20.3 67.56,20.45 70.51,20.45 arc-45 70.69,20.37 71.12,19.94 | 67.31,28.47 67.35,28.47 arc45 67.53,28.54 67.56,28.57 70.51,28.57 arc-45 70.69,28.5 71.12,28.07 | R71.1 arc45 67.41,36.55 67.56,36.7 70.51,36.7 arc-45 70.69,36.63 71.12,36.2 | R73.1 arc45 67.41,44.68 67.56,44.83 70.51,44.83 arc-45 70.69,44.76 71.12,44.32 | R75.1 arc45 67.41,52.81 67.56,52.96 70.51,52.96 arc-45 70.69,52.89 71.12,52.45 | R77.1 arc45 67.41,60.94 67.56,61.09 70.51,61.09 arc-45 70.69,61.01 71.12,60.58
A-OUT
  Bottom 0.406: 116.71,58.55 IC3.1 | C17.2 R22.2
  Bottom 0.457: R12.2 116.71,58.55
  Bottom 0.61: R12.2 C17.2
  Bottom 1.016: R22.2 115.7,53.21 | 115.7,53.21 115.7,57.28 | 115.7,53.21 115.7,48.9 116.97,47.62 J1.1
D-OUT+5V
  Bottom 0.61: 124.27,35.18 124.27,35.62 124.33,35.69 124.97,35.05 | 124.27,35.18 124.27,34.35 123.7,33.78 IC8.3 | IC8.5 124.4,35.05 124.27,35.18
  Bottom 0.813: 117.73,45.09 J1.2 | 124.33,35.69 124.33,40.26 123.57,41.02 122.56,41.02 121.79,41.78 121.79,44.32 121.03,45.09 120.27,45.09
  Bottom 1.016: J1.2 120.02,45.09 120.27,45.34 R30.2 120.27,45.09 R32.1
GND  (via drill 0.8 pad 1.42, 1 pad 1.93, 1 pad 2.18, 3 pad 4)  (1 unrouted)
  Top 1.016: v181.23,62.87 v177.16,62.87 | v181.23,46.61 v177.16,46.61 | v181.23,30.35 v177.16,30.35 | v181.23,14.1 v177.16,14.1 | v159.64,55.75 v159.64,60.33 | v159.64,39.5 v159.64,44.07 | v159.64,23.24 v159.64,27.81 | v132.46,23.75 v128.4,23.75 | v148.46,25.78 v148.46,29.08 | v148.46,42.04 v148.46,45.34 | v147.45,58.29 v147.45,61.59 | v161.67,7.24 v161.67,12.07 | v132.72,6.99 v132.72,11.05 | v145.41,61.85 v145.41,66.42 | v132.46,39.75 v121.03,39.75 | v127.13,57.53 v130.68,57.53 | v126.75,69.72 v131.06,69.72 | v111.63,77.6 v111.63,73.53
  Bottom 0.406: 114.3,65.47 114.3,65.59 113.73,66.17 113.73,66.52 113.41,66.93 C7.2 112.14,66.93 111.74,68.36 | R11.2 119.83,57.34 118.62,58.55 IC2.4
  Bottom 0.61: R47.2 C55.1 | 144.61,25.53 C54.2 | IC9.4 137.29,21.46 136.78,21.97 136.33,21.97 C58.1 | C36.1 R33.2 148.4,41.34 | 144.61,41.78 C35.2 | IC6.4 137.29,37.72 136.78,38.23 136.33,38.23 C39.1 | R10.2 C10.1 | IC1.4 172.59,65.15 173.1,64.64 173.55,64.64 C8.1 | R31.2 C31.1 | IC5.4 172.59,48.9 173.1,48.39 173.55,48.39 C28.1 | C49.1 R46.2 161.48,29.02 | 165.27,28.57 C51.2 | IC7.4 172.59,32.64 173.1,32.13 173.55,32.13 C46.1 | R63.2 C68.1 | 165.27,12.32 C69.2 | IC10.4 172.59,16.38 173.1,15.88 173.55,15.88 C65.1 | R13.2 C18.1 | IC4.4 137.29,53.98 136.78,54.48 136.33,54.48 C21.1 | IC3.6 114.3,65.47 | IC2.4 118.62,62.23 118.49,62.36 | 112.14,67.69 111.74,68.36 111.38,68.96
  Bottom 0.813: 165.27,12.32 165.23,12.32 164.85,11.94 161.8,11.94 v161.67,12.07 161.48,12.25 R63.2 | C16.2 144.23,58.13 144.53,58.42 147.32,58.42 v147.45,58.29 148.08,58.29 148.4,57.98 R13.2 | 144.61,41.78 144.87,42.04 v148.46,42.04 148.46,40.45 R33.2 | C54.2 144.87,25.78 v148.46,25.78 148.4,25.71 R47.2
  Bottom 1.27: 155.07,27.81 155.57,27.31 157.61,27.31 | 151,49.91 153.42,52.32 JP20.1 | 150.5,32.89 153.67,36.07 JP24.1 | JP28.1 153.67,19.81 150.75,16.89
  Bottom 1.778: 29.72,19.97 D83.A D82.A D81.A D80.A D79.A 2.87,19.97 arc45 2.79,19.94 | 29.72,19.97 D84.A D85.A D86.A D87.A D88.A D89.A D90.A D91.A | D72.A D73.A D74.A D75.A D76.A D77.A D78.A | D72.A D71.A 29.46,28.1 | 29.46,28.1 D70.A D69.A D68.A D67.A D66.A 3.63,28.1 arc45 3.56,28.07 | D72.A 34.83,28.1 34.8,28.07 36.58,28.07 | 47.72,36.23 D62.A D63.A D64.A D65.A | 29.46,36.23 D58.A D59.A D60.A D61.A 47.72,36.23 | 29.46,36.23 D57.A D56.A D55.A D54.A D53.A 4.65,36.23 arc45 4.57,36.2 | 47.72,36.23 47.75,36.2 | D44.A D43.A D42.A D41.A D40.A 4.4,44.36 arc45 4.32,44.32 | D44.A 31.27,44.36 | 31.27,44.36 D45.A D46.A D47.A D48.A D49.A D50.A D51.A D52.A | 31.27,44.36 31.24,44.32 29.72,44.32 | 29.72,44.32 27.46,44.32 D44.A | 29.72,52.48 D31.A D30.A D29.A D28.A D27.A 2.87,52.48 arc45 2.79,52.45 | 29.72,52.48 D32.A D33.A D34.A D35.A D36.A D37.A D38.A D39.A | 29.46,60.61 D19.A D20.A D21.A D22.A D23.A D24.A D25.A D26.A | 29.46,60.61 D18.A D17.A D16.A D15.A D14.A 2.87,60.61 arc-45 2.69,60.69 | D13.A D12.A D11.A D10.A D9.A D8.A D7.A D6.A D5.A D4.A D3.A D2.A D1.A | JP11.1 arc-45 29.56,28.01 29.46,28.1 | JP13.1 29.72,19.97 | JP9.1 arc-45 29.56,36.14 29.46,36.23 | JP7.1 29.72,44.32 | JP3.1 arc-45 29.56,60.52 29.46,60.61 | JP5.1 29.72,52.48
  other vias: 179.58,78.61 106.3,78.74 179.45,5.33 106.17,5.46 5.33,78.61 5.46,5.33 78.49,5.46 78.36,78.74
  pour Bottom (isolate 0.406): -0.25,83.82 83.82,83.82 83.82,0 -0.25,0
  pour Bottom (isolate 0.406): 184.78,83.82 100.71,83.82 100.97,0 184.78,0
N$1
  Bottom 0.61: R10.1 163.38,63.63 | 163.38,63.63 C10.2 | R9.2 163.96,63.5 | 163.96,63.5 163.51,63.5 163.38,63.63 | IC1.5 164.72,65.15 164.47,64.9 164.47,64.01 163.96,63.5
N$3
  Bottom 0.254: C5.1 C4.1
  Bottom 0.61: IC1.7 164.97,67.69 164.47,68.2 163.19,68.2 | 163.19,68.2 162.43,68.2 | 162.43,68.2 161.63,68.2 C4.1 | R6.1 163.45,68.45 163.19,68.2 | C2.1 163.07,70.61 162.43,69.98 162.43,68.2
N$4
  Bottom 1.27: U2.IN+ 130.68,72.77 127.89,75.57 108.59,75.57 106.05,73.03 106.05,41.97 108.59,39.43 J2.1
N$5
  Bottom 1.016: R79.2 67.31,66.17 | 67.31,66.17 R78.1 | C77.1 67.44,66.04 arc-90 67.31,66.17
N$6
  Bottom 0.61: R7.1 C8.2 173.55,66.42 IC1.3 169.8,66.42 169.29,65.91 169.29,63.82 R8.2
N$7
  Bottom 0.61: C2.2 R2.2
N$8
  Bottom 0.61: IC1.6 163.7,66.42 | 163.7,66.42 163.64,66.42 | 163.64,66.42 R6.2 163.51,66.61 163.7,66.42 | 163.64,66.42 161.61,66.42 C5.2 C4.2 161.42,66.42 C9.2
N$9
  Bottom 0.61: C3.2 R3.2 173.29,68.65 172.34,67.69 IC1.2 169.8,67.69 169.29,68.2 169.29,70.55 R2.1
N$10
  Bottom 0.61: C3.1 R3.1 171.38,70.55 171.07,70.23 | D92.A 171.83,72.52 171.07,71.76 171.07,70.23 | 171.07,70.23 171.07,69.02 IC1.1
N$12  (via drill 1 pad 2.18)
  Top 1.016: v131.44,53.09 v120.78,53.09
  Bottom 0.61: IC2.2 121.16,58.42 121.79,57.79 121.73,57.72 R11.1 R18.1 121.73,54.55
  Bottom 0.813: 121.73,54.55 121.73,54.04 v120.78,53.09
  Bottom 1.016: 130.43,34.42 130.43,18.16 | D96.C 130.86,34.85 130.43,34.42 | D98.C 130.86,18.6 130.43,18.16 | 179.2,24.26 179.2,10.29 177.93,9.02 131.7,9.02 130.43,10.29 130.43,18.16 | 179.2,24.26 179.2,40.51 | 179.2,40.51 179.2,55.75 | D97.C 178.69,23.75 179.2,24.26 | D95.C 178.69,40.01 179.2,40.51 | D93.C 178.69,56.26 179.2,55.75 | 130.43,34.42 130.43,46.1 | D94.C 130.94,46.61 130.43,46.1 | 130.43,46.1 130.43,49.66 131.44,50.67 v131.44,53.09 | D92.C 178.18,72.52 179.2,71.5 179.2,55.75
N$13
  Bottom 1.016: R77.2 67.31,58.04 | 67.31,58.04 R76.1 | C76.1 67.44,57.91 arc-90 67.31,58.04
N$14
  Bottom 1.016: R75.2 67.31,49.66 | 67.31,49.66 R74.1 | C75.1 67.44,49.78 arc90 67.31,49.66
N$15
  Bottom 1.016: R73.2 67.31,41.53 | 67.31,41.53 R72.1 | C74.1 67.44,41.66 arc90 67.31,41.53
N$16
  Bottom 1.016: R71.2 67.31,33.4 | 67.31,33.4 R70.1 | C73.1 67.44,33.53 arc90 67.31,33.4
N$17
  Bottom 1.016: R69.2 67.31,25.53 | 67.31,25.53 R68.1 | C72.1 67.44,25.4 arc-90 67.31,25.53
N$18
  Bottom 1.016: R67.2 67.31,17.4 | 67.31,17.4 R66.1 | C71.1 67.44,17.27 arc-90 67.31,17.4
N$23
  Bottom 0.61: IC2.1 122.43,59.44 123.06,58.8 123.06,50.67 122.3,49.91 121.03,49.91 120.27,49.15 R30.1
N$24
  Bottom 0.406: 117.73,60.83 117.73,57.79 117.66,57.79 R12.1
  Bottom 0.61: 117.73,57.34 R12.1 C17.1 R18.2 | IC3.2 115.57,60.96 115.95,61.34 117.22,61.34 117.73,60.83
N$25
  Bottom 0.61: IC2.3 119.89,60.71 120.52,61.34 127.06,61.34 C13.1
  Bottom 1.016: R65.S C13.1
N$26
  Bottom 1.016: R65.E 124.59,69.98 123.57,68.96 R4.2
N$27
  Bottom 1.016: R65.A 124.59,56.33 R15.1
N$28
  Bottom 0.61: IC5.6 163.7,50.17 | 163.7,50.17 163.64,50.17 | 163.64,50.17 R24.2 163.51,50.36 163.7,50.17 | 163.64,50.17 161.61,50.17 C26.2 C25.2 161.42,50.17 C29.2
N$29
  Bottom 1.016: R64.E 111.76,71.63 112.97,70.42 112.97,69.22 R5.1
N$30
  Bottom 1.016: R64.A 108.08,56.33 R14.2
N$31
  Bottom 0.61: IC3.3 114.3,60.96 113.92,61.34 111.38,61.34 110.62,62.1 110.62,63.88 | R64.S 110.62,63.88 | C11.2 110.62,63.88
N$32
  Bottom 1.016: LED1.C R1.1
N$33
  Bottom 0.61: R31.1 163.38,47.37 | 163.38,47.37 C31.2 | R29.2 163.96,47.24 | 163.96,47.24 163.51,47.24 163.38,47.37 | IC5.5 164.72,48.9 164.47,48.64 164.47,47.75 163.96,47.24
N$34
  Bottom 1.016: LED3.C 128.17,15.09 127.38,15.88 127.38,16.96 | R56.1 127.38,16.96 | 127.38,16.96 R57.1
N$35
  Bottom 0.254: C25.1 C26.1
  Bottom 0.61: IC5.7 164.97,51.44 164.47,51.94 163.19,51.94 | 163.19,51.94 162.43,51.94 | 162.43,51.94 161.63,51.94 C25.1 | R24.1 163.45,52.2 163.19,51.94 | C19.1 163.07,54.36 162.43,53.72 162.43,51.94
N$36
  Bottom 0.61: C19.2 R19.2
N$37
  Bottom 0.61: C22.2 R21.2 173.29,52.39 172.34,51.44 IC5.2 169.8,51.44 169.29,51.94 169.29,54.29 R19.1
N$38
  Bottom 0.254: IC5.1 171.07,52.77
  Bottom 0.61: C22.1 R21.1 171.38,54.29 171.07,53.98 | 171.07,52.77 171.07,53.98 | 171.07,53.98 171.07,55.25 172.09,56.26 D93.A
N$39
  Bottom 0.61: R26.1 C28.2 173.55,50.17 IC5.3 169.8,50.17 169.29,49.66 169.29,47.56 R28.2
N$40
  Bottom 0.61: IC6.6 146.18,36.45 | 146.18,36.45 146.24,36.45 | 146.24,36.45 R39.2 146.37,36.26 146.18,36.45 | 146.24,36.45 148.27,36.45 | 148.27,36.45 C42.2 C41.2 148.46,36.45 | C38.2 148.27,36.45
N$41
  Bottom 0.61: R33.1 146.5,39.24 | 146.5,39.24 C36.2 | R34.2 145.92,39.37 | 145.92,39.37 146.37,39.37 146.5,39.24 | IC6.5 145.16,37.72 145.41,37.97 145.41,38.86 145.92,39.37
N$42
  Bottom 0.61: IC7.6 163.7,33.91 | 163.7,33.91 163.64,33.91 | 163.64,33.91 R40.2 163.51,34.1 163.7,33.91 | 163.64,33.91 161.61,33.91 C44.2 C43.2 161.42,33.91 C47.2
N$43
  Bottom 0.61: R46.1 163.38,31.11 | 163.38,31.11 C49.2 | R45.2 163.96,30.99 | 163.96,30.99 163.51,30.99 163.38,31.11 | IC7.5 164.72,32.64 164.47,32.39 164.47,31.5 163.96,30.99
N$44
  Bottom 0.254: C43.1 C44.1
  Bottom 0.61: IC7.7 164.97,35.18 164.47,35.69 163.19,35.69 | 163.19,35.69 162.43,35.69 | 162.43,35.69 161.63,35.69 C43.1 | R40.1 163.45,35.94 163.19,35.69 | C37.1 163.07,38.1 162.43,37.47 162.43,35.69
N$45
  Bottom 0.61: C37.2 R36.2
N$46
  Bottom 0.61: C40.2 R38.2 173.29,36.13 172.34,35.18 IC7.2 169.8,35.18 169.29,35.69 169.29,38.03 R36.1
N$47
  Bottom 0.61: C40.1 R38.1 171.38,38.03 171.07,37.72 | D95.A 171.83,40.01 171.07,39.24 171.07,37.72 | 171.07,37.72 171.07,36.51 IC7.1
N$48
  Bottom 0.61: R42.1 C46.2 173.55,33.91 IC7.3 169.8,33.91 169.29,33.4 169.29,31.31 R44.2
N$49
  Bottom 0.254: C42.1 C41.1
  Bottom 0.61: IC6.7 144.91,35.18 145.41,34.67 146.69,34.67 | 146.69,34.67 147.45,34.67 | 147.45,34.67 148.25,34.67 C41.1 | R39.1 146.43,34.42 146.69,34.67 | C48.1 146.81,32.26 147.45,32.89 147.45,34.67
N$50
  Bottom 0.61: C48.2 R43.2
N$51
  Bottom 0.61: IC10.6 163.7,17.65 | 163.7,17.65 163.64,17.65 | 163.64,17.65 R55.2 163.51,17.85 163.7,17.65 | 163.64,17.65 161.61,17.65 C63.2 C62.2 161.42,17.65 C66.2
N$52
  Bottom 0.61: R63.1 163.38,14.86 | 163.38,14.86 C68.2 | R62.2 163.96,14.73 | 163.96,14.73 163.51,14.73 163.38,14.86 | IC10.5 164.72,16.38 164.47,16.13 164.47,15.24 163.96,14.73
N$53
  Bottom 0.254: C62.1 C63.1
  Bottom 0.61: IC10.7 164.97,18.92 164.47,19.43 163.19,19.43 | 163.19,19.43 162.43,19.43 | 162.43,19.43 161.63,19.43 C62.1 | R55.1 163.45,19.68 163.19,19.43 | C56.1 163.07,21.84 162.43,21.21 162.43,19.43
N$54
  Bottom 0.61: C56.2 R50.2
N$55
  Bottom 0.61: C59.2 R53.2 173.29,19.88 172.34,18.92 IC10.2 169.8,18.92 169.29,19.43 169.29,21.78 R50.1
N$56
  Bottom 0.61: C59.1 R53.1 171.44,21.78 171.13,21.46 | IC10.1 171.13,21.46 | 171.13,21.46 171.13,23.05 171.83,23.75 D97.A
N$57
  Bottom 0.61: R59.1 C65.2 173.55,17.65 IC10.3 169.8,17.65 169.29,17.14 169.29,15.05 R61.2
N$58
  Bottom 0.61: C45.2 R41.2 136.59,34.22 137.54,35.18 IC6.2 140.08,35.18 140.59,34.67 140.59,32.32 R43.1
N$59
  Bottom 0.61: IC6.1 138.75,33.59 137.48,32.32 R41.1 C45.1 132.58,32.32 D96.A
N$60
  Bottom 0.61: IC4.6 146.18,52.7 | 146.18,52.7 146.24,52.7 | 146.24,52.7 R23.2 146.37,52.51 146.18,52.7 | 146.24,52.7 148.27,52.7 | 148.27,52.7 C24.2 C23.2 148.46,52.7 | C20.2 148.27,52.7
N$61
  Bottom 0.61: R13.1 146.5,55.5 | 146.5,55.5 C18.2 | R16.2 145.92,55.63 | 145.92,55.63 146.37,55.63 146.5,55.5 | IC4.5 145.16,53.98 145.41,54.23 145.41,55.12 145.92,55.63
N$62
  Bottom 0.254: C23.1 C24.1
  Bottom 0.61: IC4.7 144.91,51.44 145.41,50.93 146.69,50.93 | 146.69,50.93 147.45,50.93 | 147.45,50.93 148.25,50.93 C23.1 | R23.1 146.43,50.67 146.69,50.93 | C30.1 146.81,48.51 147.45,49.15 147.45,50.93
N$63
  Bottom 0.61: C30.2 R27.2
N$64
  Bottom 0.61: C27.2 R25.2 136.59,50.48 137.54,51.44 IC4.2 140.08,51.44 140.59,50.93 140.59,48.58 R27.1
N$65
  Bottom 0.61: C27.1 135.45,48.58 | IC4.1 138.75,49.85 137.48,48.58 R25.1 135.76,48.58 | 135.76,48.58 135.45,48.58 | 135.45,48.58 135.25,48.39 | D94.A 135.25,46.68 135.25,48.07 135.76,48.58
N$66
  Bottom 0.61: R20.1 C21.2 136.33,52.7 IC4.3 140.08,52.7 140.59,53.21 140.59,55.31 R17.2
N$67
  Bottom 0.61: R37.1 C39.2 136.33,36.45 IC6.3 140.08,36.45 140.59,36.96 140.59,39.05 R35.2
N$69
  Bottom 0.61: IC9.6 146.18,20.19 | 146.18,20.19 146.24,20.19 | 146.24,20.19 R54.2 146.37,20 146.18,20.19 | 146.24,20.19 148.27,20.19 | 148.27,20.19 C61.2 C60.2 148.46,20.19 | C57.2 148.27,20.19
N$70
  Bottom 0.61: R47.1 146.5,22.99 | 146.5,22.99 C55.2 | R48.2 145.92,23.11 | 145.92,23.11 146.37,23.11 146.5,22.99 | IC9.5 145.16,21.46 145.41,21.72 145.41,22.61 145.92,23.11
N$71
  Bottom 0.254: C60.1 C61.1
  Bottom 0.61: IC9.7 144.91,18.92 145.41,18.42 146.69,18.42 | 146.69,18.42 147.45,18.42 | 147.45,18.42 148.25,18.42 C60.1 | R54.1 146.43,18.16 146.69,18.42 | C67.1 146.81,16 147.45,16.64 147.45,18.42
N$72
  Bottom 0.61: C67.2 R60.2
N$73
  Bottom 0.61: C64.2 R58.2 136.59,17.97 137.54,18.92 IC9.2 140.08,18.92 140.59,18.42 140.59,16.07 R60.1
N$74
  Bottom 0.61: IC9.1 138.75,17.34 137.48,16.07 R58.1 C64.1 132.58,16.07 D98.A
N$75
  Bottom 0.61: R52.1 C58.2 136.33,20.19 IC9.3 140.08,20.19 140.59,20.7 140.59,22.79 R49.2
N$78
  Bottom 0.61: IC8.1 121.73,31.43 | 121.73,31.88 IC8.2 | 121.73,31.43 121.79,31.37 | 121.73,31.43 IC8.2 | 121.22,31.81 121.22,32 IC8.2
  Bottom 0.813: SP1.+ 112.14,31.88 121.16,31.88 121.22,31.81
N$79
  Bottom 0.406: IC8.6 IC8.7
  Bottom 0.61: 126.87,33.15 126.87,32.57 IC8.7 126.93,33.59 126.87,33.66 126.87,33.15 | 126.87,33.15 125.09,33.15 123.83,31.88 123.83,23.24 122.05,21.46 R51.2
OUT1
  Bottom 1.016: R74.2 66.21,46.8 arc-45 66.03,46.88 65.79,47.12 D39.C
  Bottom 1.778: D27.C D28.C D29.C D30.C D31.C 29.72,47.12 | 29.72,47.12 D32.C D33.C D34.C D35.C D36.C D37.C D38.C D39.C | JP6.1 29.72,47.12
OUT3
  Bottom 1.016: R66.2 66.21,14.29 arc-45 66.03,14.36 65.79,14.61 D91.C
  Bottom 1.778: D91.C D90.C D89.C D88.C D87.C D86.C D85.C D84.C 29.72,14.61 | 29.72,14.61 D83.C D82.C D81.C D80.C D79.C | JP14.1 29.72,14.61
OUT4
  Bottom 1.016: R78.2 66.21,63.06 arc-45 66.03,63.13 65.79,63.37 D13.C
  Bottom 1.778: 29.46,63.37 D6.C D7.C D8.C D9.C D10.C D11.C D12.C D13.C | 29.46,63.37 D5.C D4.C D3.C D2.C D1.C | JP2.1 29.72,63.73 arc-45 29.64,63.55 29.46,63.37
OUT5
  Bottom 1.016: R76.2 66.21,54.93 arc-45 66.03,55 65.79,55.25 D26.C
  Bottom 1.778: D26.C D25.C D24.C D23.C D22.C D21.C D20.C D19.C 29.97,55.25 | 29.97,55.25 D18.C D17.C D16.C D15.C D14.C | JP4.1 29.72,55.6 arc45 29.79,55.43 29.97,55.25
OUT9
  Bottom 1.016: R72.2 66.21,38.67 arc-45 66.03,38.75 65.79,38.99 D52.C
  Bottom 1.778: D40.C D41.C D42.C D43.C D44.C 29.21,38.99 | 29.21,38.99 D45.C D46.C D47.C D48.C D49.C D50.C D51.C D52.C | JP8.1 29.7,39.37 arc45 29.52,39.3 29.21,38.99
OUT10
  Bottom 1.016: C9.1 155.2,63.62 JP17.1
OUT12
  Bottom 1.016: JP19.1 150.62,55.63 C20.1
OUT13
  Bottom 1.016: C66.1 155.2,14.86 JP29.1
OUT14
  Bottom 1.016: C29.1 155.2,47.37 JP21.1
OUT15
  Bottom 1.016: 154.94,39.24 JP23.1 154.94,39.25 C38.1
OUT16
  Bottom 1.016: C47.1 155.2,31.11 JP25.1
OUT17
  Bottom 1.016: JP27.1 150.62,23.11 C57.1
OUT21
  Bottom 1.016: R70.2 66.21,30.55 arc-45 66.03,30.62 65.79,30.86 D65.C
  Bottom 1.778: D65.C D64.C D63.C D62.C D61.C D60.C D59.C D58.C 29.72,30.86 | 29.72,30.86 D57.C D56.C D55.C D54.C D53.C | JP10.1 29.72,30.86
OUT22
  Bottom 1.016: R68.2 66.21,22.42 arc-45 66.03,22.49 65.79,22.73 D78.C
  Bottom 1.778: D66.C D67.C D68.C D69.C D70.C | D70.C D71.C D72.C D73.C D74.C D75.C D76.C D77.C D78.C | D70.C 29.23,22.73 arc45 29.41,22.81 JP12.1
S$1
  Bottom 0.61: IC3.7 115.57,63.25 115.19,62.87 113.16,62.87 112.9,63.12 112.9,64.58 IC3.5
S$2
  Bottom 0.61: R51.1 LED2.A
S$3  (via drill 3 pad 4)
  other vias: 124.84,45.72
S$4  (via drill 3 pad 4)
  other vias: 109.6,16

## Text on the board
Bottom: SEMICONDUCTOR RADIATION DETECTOR / & GAMMA ANALYZER V1 PROT. BPW34 MATRIX | SEMICONDUCTOR RADIATION DETECTOR / & GAMMA ANALYZER / V1 PROT. BPW34 MATRIX | Design: Marcin Wachowiak, Poland | Design: Marcin Wachowiak, Poland
tPlace: D1-D91 / BPW34
tNames: SEMICONDUCTOR RADIATION DETECTOR / & GAMMA ANALYZER / V1 PROT. BPW34 MATRIX | Design: Marcin Wachowiak, Poland | Design: Marcin Wachowiak, Poland